# EAGLE board CT_schematic (EAGLE 7.6.0)

Size 100 x 80 mm. Coordinates in mm from the lower left corner, seen from the top.
Outline: 0,0 100,0 100,80 0,80 0,0
Copper layers (1*16): Top 0.035mm / dielectric 1.5mm / Bottom 0.035mm
Design rules "default": minimum track width 10mil, minimum drill 24mil, track to track 8mil, track to pad 8mil, pad to pad 8mil, via to via 8mil, smd to smd 8mil, copper to edge 40mil, drill to drill 8mil, minimum pad ring 10mil, minimum via ring 8mil, stop-mask expansion 4mil, vias tented up to drill 0mil, thermal gap 10mil

## Footprints (pad centres in the part's own frame; a part is rotated, then mirrored left to right if it is on the bottom)
C0603 = smd 0.8 x 0.8: 1 -0.762,0; 2 0.762,0
C0402 = smd 0.5 x 0.5: 1 -0.508,0; 2 0.508,0
C1206 = smd 1.3 x 1.6: 1 -1.524,0; 2 1.524,0
C0805 = smd 1.2 x 1.3: 1 -1.016,0; 2 1.016,0
2220 = smd 1.85 x 5.5: 1 -2.55,0; 2 2.55,0
C1210 = smd 1.2 x 2.5: 1 -1.524,0; 2 1.524,0
R0603 = smd 0.8 x 0.8: 1 -0.762,0; 2 0.762,0
EXV-9H = smd 3.505 x 1.676: 1 -2.857,0; 2 2.857,0
L0603 = smd 0.8 x 0.8: 1 -0.762,0; 2 0.762,0
DR1040 = smd 1.6 x 3.2: 1 -4.458,0; 2 4.458,0
PJ-037B_PACKAGE = drill 3.7 square: 1 12,0 | drill 3.2 square: 2 6,0
TFBGA100 = smd 0.4 x 0.4: A1 -3.6,3.6; A2 -2.8,3.6; A3 -2,3.6; A4 -1.2,3.6; A5 -0.4,3.6; A6 0.4,3.6; A7 1.2,3.6; A8 2,3.6; A9 2.8,3.6; A10 3.6,3.6; B1 -3.6,2.8; B2 -2.8,2.8; B3 -2,2.8; B4 -1.2,2.8; B5 -0.4,2.8; B6 0.4,2.8; B7 1.2,2.8; B8 2,2.8; B9 2.8,2.8; B10 3.6,2.8; C1 -3.6,2; C2 -2.8,2; C3 -2,2; C4 -1.2,2; C5 -0.4,2; C6 0.4,2; C7 1.2,2; C8 2,2; C9 2.8,2; C10 3.6,2; D1 -3.6,1.2; D2 -2.8,1.2; D3 -2,1.2; D4 -1.2,1.2; D5 -0.4,1.2; D6 0.4,1.2; D7 1.2,1.2; D8 2,1.2; D9 2.8,1.2; D10 3.6,1.2; E1 -3.6,0.4; E2 -2.8,0.4; E3 -2,0.4; E4 -1.2,0.4; E5 -0.4,0.4; E6 0.4,0.4; E7 1.2,0.4; E8 2,0.4; E9 2.8,0.4; E10 3.6,0.4; F1 -3.6,-0.4; F2 -2.8,-0.4; F3 -2,-0.4; F4 -1.2,-0.4; F5 -0.4,-0.4; F6 0.4,-0.4; F7 1.2,-0.4; F8 2,-0.4; F9 2.8,-0.4; F10 3.6,-0.4; G1 -3.6,-1.2; G2 -2.8,-1.2; G3 -2,-1.2; G4 -1.2,-1.2; G5 -0.4,-1.2; G6 0.4,-1.2; G7 1.2,-1.2; G8 2,-1.2; G9 2.8,-1.2; G10 3.6,-1.2; H1 -3.6,-2; H2 -2.8,-2; H3 -2,-2; H4 -1.2,-2; H5 -0.4,-2; H6 0.4,-2; H7 1.2,-2; H8 2,-2; H9 2.8,-2; H10 3.6,-2; J1 -3.6,-2.8; J2 -2.8,-2.8; J3 -2,-2.8; J4 -1.2,-2.8; J5 -0.4,-2.8; J6 0.4,-2.8; J7 1.2,-2.8; J8 2,-2.8; J9 2.8,-2.8; J10 3.6,-2.8; K1 -3.6,-3.6; K2 -2.8,-3.6; K3 -2,-3.6; K4 -1.2,-3.6; K5 -0.4,-3.6; K6 0.4,-3.6; K7 1.2,-3.6; K8 2,-3.6; K9 2.8,-3.6; K10 3.6,-3.6
SOIC-8 = smd 1.6 x 0.6: 1 -2.7,1.905 | smd 1.55 x 0.6: 2 -2.7,0.635; 3 -2.7,-0.635; 4 -2.7,-1.905; 5 2.7,-1.905; 6 2.7,-0.635; 7 2.7,0.635; 8 2.7,1.905
SAMTEC_FTSH-105-01-L-DV-K = smd 0.762 x 2.794: 1 -2.54,-2.032; 2 -2.54,2.032; 3 -1.27,-2.032; 4 -1.27,2.032; 5 0,-2.032; 6 0,2.032; 7 1.27,-2.032; 8 1.27,2.032; 9 2.54,-2.032; 10 2.54,2.032
TDFN-8/6MM = smd 0.3 x 0.75: 1 0,0; 2 0.5,0; 3 1,0; 4 1.5,0; 5 1.5,3; 6 1,3; 7 0.5,3; 8 0,3
QFN-24 = smd 0.7 x 0.305: 1 -1.815,1.25; 2 -1.815,0.75; 3 -1.815,0.25; 4 -1.815,-0.25; 5 -1.815,-0.73; 6 -1.815,-1.25; 13 1.815,-1.25; 14 1.815,-0.75; 15 1.815,-0.25; 16 1.815,0.25; 17 1.815,0.75; 18 1.815,1.25 | smd 0.305 x 0.7: 7 -1.25,-1.815; 8 -0.75,-1.815; 9 -0.25,-1.815; 10 0.25,-1.815; 11 0.75,-1.815; 12 1.25,-1.815; 19 1.25,1.815; 20 0.75,1.815; 21 0.25,1.815; 22 -0.25,1.815; 23 -0.75,1.815; 24 -1.25,1.815 | smd 2.591 x 2.591: 25 0,0
MICRO_USB_AB = smd 0.4 x 1.35: 1 1.3,0.26; 2 0.65,0.26; 3 0,0.26; 4 -0.65,0.26; 5 -1.3,0.26 | drill 0.6 pad 0.95 long: 6 4.175,-2.54; 7 -4.175,-2.54 | drill 0.7 pad 1.1 long: 8 -2.225,0.46; 9 2.225,0.46
SOT143B = smd 1 x 0.7: 1 -0.75,-1 | smd 0.6 x 0.7: 2 0.95,-1; 3 0.95,1; 4 -0.95,1
SOT-23-6 = smd 1.1 x 0.6: 1 -1.4,0.95; 2 -1.4,0; 3 -1.4,-0.95; 4 1.4,-0.95; 5 1.4,0; 6 1.4,0.95
ASEK = smd 1.4 x 1: 1 -1.1,-0.8; 2 1.1,-0.8; 3 1.1,0.8; 4 -1.1,0.8
ASFL1 = smd 1.7 x 1.5: 1 -1.27,-1.1; 2 1.27,-1.1; 3 1.27,1.1; 4 -1.27,1.1
WSON-8 = smd 0.3 x 0.6: 1 -0.75,0; 2 0.05,0; 3 0.85,0; 4 1.65,0; 5 1.65,3.8; 6 0.85,3.8; 7 0.05,3.8; 8 -0.75,3.8 | smd 3 x 2.6: PAD 0.45,1.9
QFN-16_EP = smd 0.805 x 0.3: 1 -1.452,0.75; 2 -1.452,0.25; 3 -1.452,-0.25; 4 -1.452,-0.75; 9 1.452,-0.75; 10 1.452,-0.25; 11 1.452,0.25; 12 1.452,0.75 | smd 0.3 x 0.805: 5 -0.75,-1.452; 6 -0.25,-1.452; 7 0.25,-1.452; 8 0.75,-1.452; 13 0.75,1.452; 14 0.25,1.452; 15 -0.25,1.452; 16 -0.75,1.452 | smd 1.55 x 1.55: 17 0,0
QFN-38_UHF = smd 0.75 x 0.3: 1 -2.4,2.75; 2 -2.4,2.25; 3 -2.4,1.75; 4 -2.4,1.25; 6 -2.4,0.25; 7 -2.4,-0.25; 8 -2.4,-0.75; 9 -2.4,-1.25; 10 -2.4,-1.75; 11 -2.4,-2.25; 12 -2.4,-2.75; 20 2.4,-2.75; 21 2.4,-2.25; 22 2.4,-1.75; 23 2.4,-1.25; 24 2.4,-0.75; 25 2.4,-0.25; 26 2.4,0.25; 27 2.4,0.75; 28 2.4,1.25; 29 2.4,1.75; 30 2.4,2.25; 31 2.4,2.75 | smd 0.758 x 0.3: 5 -2.4,0.75 | smd 0.3 x 0.75: 13 -1.5,-3.4; 14 -1,-3.4; 15 -0.5,-3.4; 16 0,-3.4; 17 0.5,-3.4; 18 1,-3.4; 19 1.5,-3.4; 32 1.5,3.4; 33 1,3.4; 34 0.5,3.4; 35 0,3.4; 36 -0.5,3.4; 37 -1,3.4; 38 -1.5,3.4 | smd 3.2 x 5.2: 39 0,0
IRF8306MTRPBF = smd 0.9 x 1.85: 1 0,0; 2 0,-2.35; 6 6.4,0; 7 6.4,-2.35 | smd 0.75 x 0.75: 3 1.75,-1.175 | smd 1.45 x 0.87: 4 3.5,-0.565; 5 3.5,-1.785
SW_4-1437565-2 = smd 1.4 x 2.1: 1 -2.23,4.55; 2 -2.23,-4.55; 3 2.23,4.55; 4 2.23,-4.55
LGM67K-G1J2-24-Z = smd 0.8 x 1.4: A -2,0; C 0,0
NC7SZ125M5X = smd 1.3 x 0.7: 1 -1.3,0.95; 2 -1.3,0; 3 -1.3,-0.95; 4 1.3,-0.95; 5 1.3,0.95

## Placement (x,y rotation side)
C1  1e-06  [C0603]  -81.28,76.2 0 top  (outside the outline)
C2  1e-07  [C0603]  -85.09,76.2 0 top  (outside the outline)
C3  1e-07  [C0603]  -15.24,81.28 0 top  (outside the outline)
C4  1e-07  [C0603]  -19.05,81.28 0 top  (outside the outline)
C5  1e-07  [C0603]  -22.86,81.28 0 top  (outside the outline)
C6  1e-07  [C0603]  -26.67,81.28 0 top  (outside the outline)
C7  4.7e-06  [C0603]  -69.85,76.2 0 top  (outside the outline)
C8  1e-08  [C0603]  -30.48,81.28 0 top  (outside the outline)
C9  1e-06  [C0603]  -34.29,81.28 0 top  (outside the outline)
C10  1e-07  [C0603]  -38.1,81.28 0 top  (outside the outline)
C11  1e-07  [C0603]  -41.91,81.28 0 top  (outside the outline)
C12  1e-07  [C0603]  -45.72,81.28 0 top  (outside the outline)
C13  1e-08  [C0402]  -48.26,86.36 0 top  (outside the outline)
C14  1e-08  [C0402]  -52.07,86.36 0 top  (outside the outline)
C15  1e-07  [C0402]  -55.88,86.36 0 top  (outside the outline)
C16  1e-08  [C0402]  -59.69,86.36 0 top  (outside the outline)
C17  1e-08  [C0402]  -63.5,86.36 0 top  (outside the outline)
C18  2.2e-06  [C0603]  -73.66,76.2 0 top  (outside the outline)
C19  1e-08  [C0402]  -67.31,86.36 0 top  (outside the outline)
C20  1e-08  [C0402]  -71.12,86.36 0 top  (outside the outline)
C21  1e-06  [C0603]  -49.53,81.28 0 top  (outside the outline)
C22  1e-08  [C0402]  -74.93,86.36 0 top  (outside the outline)
C23  1e-08  [C0402]  -78.74,86.36 0 top  (outside the outline)
C24  1e-08  [C0402]  -82.55,86.36 0 top  (outside the outline)
C25  1e-08  [C0402]  -86.36,86.36 0 top  (outside the outline)
C26  1e-05  [C1206]  -43.18,59.69 0 top  (outside the outline)
C27  1e-05  [C0805]  -78.74,59.69 0 top  (outside the outline)
C28  1e-05  [C0805]  -83.82,59.69 0 top  (outside the outline)
C29  1e-06  [C0603]  -53.34,81.28 0 top  (outside the outline)
C30  1e-07  [C0402]  -15.24,91.44 0 top  (outside the outline)
C31  6.8e-05  [2220]  -62.23,33.02 0 top  (outside the outline)
C32  1e-06  [C0603]  -57.15,81.28 0 top  (outside the outline)
C33  1e-05  [C1210]  -36.83,59.69 0 top  (outside the outline)
C34  1e-05  [C0805]  -15.24,66.04 0 top  (outside the outline)
C35  1e-06  [C0603]  -60.96,81.28 0 top  (outside the outline)
C36  1e-07  [C0402]  -19.05,91.44 0 top  (outside the outline)
C37  6.8e-05  [2220]  -69.85,33.02 0 top  (outside the outline)
C38  1e-08  [C0402]  -22.86,91.44 0 top  (outside the outline)
C39  1e-05  [C1206]  -49.53,59.69 0 top  (outside the outline)
C40  1e-05  [C0805]  -20.32,66.04 0 top  (outside the outline)
C41  1e-07  [C0402]  -26.67,91.44 0 top  (outside the outline)
C42  2.2e-06  [C0603]  -77.47,76.2 0 top  (outside the outline)
C43  2.45e-08  [R0603]  -15.24,71.12 0 top  (outside the outline)
C44  2.8258362168397e-09  [R0603]  -30.48,66.04 0 top  (outside the outline)
C45  7.105e-09  [R0603]  -48.26,66.04 0 top  (outside the outline)
C46  0.0001  [EXV-9H]  -64.77,50.8 0 top  (outside the outline)
C47  0.0001  [EXV-9H]  -76.2,50.8 0 top  (outside the outline)
C48  1e-08  [C0402]  -30.48,91.44 0 top  (outside the outline)
C49  1e-08  [C0402]  -34.29,91.44 0 top  (outside the outline)
C50  1e-08  [C0402]  -38.1,91.44 0 top  (outside the outline)
F1  240.0  [L0603]  -64.77,81.28 0 top  (outside the outline)
I1  2.5e-06  [DR1040]  -38.1,20.32 0 top  (outside the outline)
I2  2.5e-06  [DR1040]  -49.53,20.32 0 top  (outside the outline)
J1  PJ-037B  [PJ-037B_PACKAGE]  -74.93,7.62 0 top  (outside the outline)
R2  1000.0  [R0603]  -68.58,81.28 0 top  (outside the outline)
R7  4700.0  [R0603]  -72.39,81.28 0 top  (outside the outline)
R8  4700.0  [R0603]  -76.2,81.28 0 top  (outside the outline)
R9  2200.0  [R0603]  -80.01,81.28 0 top  (outside the outline)
R11  2200.0  [R0603]  -83.82,81.28 0 top  (outside the outline)
R13  10000.0  [R0603]  -20.32,71.12 0 top  (outside the outline)
R14  10000.0  [R0603]  -25.4,71.12 0 top  (outside the outline)
R15  10000.0  [R0603]  -30.48,71.12 0 top  (outside the outline)
R16  10000.0  [R0603]  -35.56,71.12 0 top  (outside the outline)
R17  10000.0  [R0603]  -40.64,71.12 0 top  (outside the outline)
R18  10000.0  [R0603]  -45.72,71.12 0 top  (outside the outline)
R19  10000.0  [R0603]  -50.8,71.12 0 top  (outside the outline)
R20  10000.0  [R0603]  -55.88,71.12 0 top  (outside the outline)
R21  10000.0  [R0603]  -60.96,71.12 0 top  (outside the outline)
R22  10000.0  [R0603]  -66.04,71.12 0 top  (outside the outline)
R23  10000.0  [R0603]  -71.12,71.12 0 top  (outside the outline)
R24  10000.0  [R0603]  -76.2,71.12 0 top  (outside the outline)
R25  5.0  [R0603]  -87.63,81.28 0 top  (outside the outline)
R26  47000.0  [R0603]  -81.28,71.12 0 top  (outside the outline)
R27  8060.0  [R0603]  -15.24,86.36 0 top  (outside the outline)
R28  100000.0  [R0603]  -53.34,66.04 0 top  (outside the outline)
R29  200.0  [R0603]  -19.05,86.36 0 top  (outside the outline)
R30  1000.0  [R0603]  -22.86,86.36 0 top  (outside the outline)
R31  20000.0  [R0603]  -86.36,71.12 0 top  (outside the outline)
R32  39000.0  [R0603]  -15.24,76.2 0 top  (outside the outline)
R33  300000.0  [R0603]  -58.42,66.04 0 top  (outside the outline)
R34  100000.0  [R0603]  -63.5,66.04 0 top  (outside the outline)
R35  153694.38  [R0603]  -43.18,66.04 0 top  (outside the outline)
R36  100000.0  [R0603]  -68.58,66.04 0 top  (outside the outline)
R37  20000.0  [R0603]  -20.32,76.2 0 top  (outside the outline)
R38  150000.0  [R0603]  -73.66,66.04 0 top  (outside the outline)
R39  300000.0  [R0603]  -78.74,66.04 0 top  (outside the outline)
R40  100000.0  [R0603]  -83.82,66.04 0 top  (outside the outline)
R41  200.0  [R0603]  -26.67,86.36 0 top  (outside the outline)
R42  1000.0  [R0603]  -30.48,86.36 0 top  (outside the outline)
R43  10000.0  [R0603]  -25.4,76.2 0 top  (outside the outline)
R44  75000.0  [R0603]  -30.48,76.2 0 top  (outside the outline)
R45  10000.0  [R0603]  -35.56,76.2 0 top  (outside the outline)
R46  10000.0  [R0603]  -40.64,76.2 0 top  (outside the outline)
R47  95300.0  [R0603]  -45.72,76.2 0 top  (outside the outline)
R48  95300.0  [R0603]  -50.8,76.2 0 top  (outside the outline)
R49  10000.0  [R0603]  -55.88,76.2 0 top  (outside the outline)
R50  10000.0  [R0603]  -60.96,76.2 0 top  (outside the outline)
R51  10000.0  [R0603]  -66.04,76.2 0 top  (outside the outline)
R52  40981.818181818  [R0603]  -38.1,66.04 0 top  (outside the outline)
U1  STM32F746VGH6  [TFBGA100]  -54.61,7.62 0 top  (outside the outline)
U2  AT25080B-SSHL-T  [SOIC-8]  -80.01,20.32 0 top  (outside the outline)
U3  AT25256B-SSHL-T  [SOIC-8]  -24.13,33.02 0 top  (outside the outline)
U4  FTSH-105-01-L-DV-K  [SAMTEC_FTSH-105-01-L-DV-K]  -35.56,7.62 0 top  (outside the outline)
U5  24AA04-I/MC  [TDFN-8/6MM]  -64.77,19.05 0 top  (outside the outline)
U6  USB3317C-CP-TR  [QFN-24]  -29.21,59.69 0 top  (outside the outline)
U7  47590-0001  [MICRO_USB_AB]  -83.82,7.62 0 top  (outside the outline)
U8  prtr5v0u2ax  [SOT143B]  -50.8,91.44 0 top  (outside the outline)
U9  MAX4995AAUT+T  [SOT-23-6]  -54.61,58.42 0 top  (outside the outline)
U10  ASEK-32.768KHz-ECST  [ASEK]  -55.88,50.8 0 top  (outside the outline)
U11  ASFL1-25MHZ-NCS  [ASFL1]  -85.09,41.91 0 top  (outside the outline)
U12  ASFL1-26MHZ-NCS  [ASFL1]  -26.67,52.07 0 top  (outside the outline)
U13  LP3878SDX-ADJ/NOPB  [WSON-8]  -30.48,40.64 0 top  (outside the outline)
U14  LTC3601EUD#PBF  [QFN-16_EP]  -35.56,86.36 0 top  (outside the outline)
U15  LP2951ACSDX/NOPB  [WSON-8]  -68.58,40.64 0 top  (outside the outline)
U16  LTC3601EUD#PBF  [QFN-16_EP]  -41.91,86.36 0 top  (outside the outline)
U17  LP3878SDX-ADJ/NOPB  [WSON-8]  -50.8,40.64 0 top  (outside the outline)
U18  LTC2928CUHF#PBF  [QFN-38_UHF]  -34.29,50.8 0 top  (outside the outline)
U19  IRF8306MTRPbF  [IRF8306MTRPBF]  -41.91,33.02 0 top  (outside the outline)
U20  IRF8306MTRPbF  [IRF8306MTRPBF]  -57.15,33.02 0 top  (outside the outline)
U21  4-1437565-2  [SW_4-1437565-2]  -27.94,21.59 0 top  (outside the outline)
U22  Q65110A2395  [LGM67K-G1J2-24-Z]  -17.78,59.69 0 top  (outside the outline)
U23  nc7sz125m5x  [NC7SZ125M5X]  -59.69,58.42 0 top  (outside the outline)
U24  nc7sz125m5x  [NC7SZ125M5X]  -66.04,58.42 0 top  (outside the outline)
U25  nc7sz125m5x  [NC7SZ125M5X]  -72.39,58.42 0 top  (outside the outline)

## Library data of the parts
C1-C50 F1 I1 I2 J1 R2 R7-R9 R11 R13-R52 U1-U25 = circuit_tree

## Nets
CLK_U1_A1: U1.A1 U10.3
CLK_U1_C1: U1.C1 U11.3
CLK_U6_23: U6.23 U12.3
GND: C1.2 C2.2 C3.2 C4.2 C5.2 C6.2 C7.2 C8.2 C9.2 C10.2 C11.2 C12.2 C13.2 C14.2 C15.2 C16.2 C17.2 C18.2 C19.2 C20.2 C21.2 C22.2 C23.2 C24.2 C25.2 C26.2 C27.2 C28.2 C29.2 C31.1 C31.2 C32.2 C33.2 C34.2 C35.2 C37.1 C37.2 C38.2 C39.2 C40.2 C41.2 C42.2 C43.2 C44.2 C45.2 C46.2 C47.2 C48.2 C49.2 C50.2 J1.2 R2.2 R13.2 R25.2 R26.2 R27.2 R30.2 R31.2 R33.2 R36.2 R37.2 R39.2 R42.2 R44.2 R47.2 R48.2 R49.2 R50.2 R51.2 U1.C2 U1.E4 U1.E5 U1.G1 U1.J1 U2.4 U3.4 U4.3 U4.5 U5.4 U6.25 U7.5 U7.6 U7.7 U7.8 U7.9 U8.1 U9.2 U10.2 U11.2 U12.2 U13.3 U13.PAD U14.1 U14.9 U14.17 U15.3 U15.4 U15.PAD U16.1 U16.9 U16.17 U17.3 U17.PAD U18.8 U18.9 U18.10 U18.12 U18.13 U18.24 U18.25 U18.30 U18.32 U18.39 U22.C U23.2 U23.3 U24.1 U24.3 U25.1 U25.3
NET_U1_A4: R11.1 U1.A4 U5.5
NET_U1_B4: R9.1 U1.B4 U5.6
NET_U1_D5: R13.1 U1.D5
NET_U1_E1: R7.1 U1.E1 U24.4
NET_U1_E6: R15.1 U1.E6
NET_U1_E7: C12.1 U1.E7
NET_U1_F7: R14.1 U1.F7
NET_U1_H1: C8.1 C9.1 F1.1 U1.H1
NET_U1_K9: U22.A
NET_U1_K10: U21.3 U21.4
NET_U2_3: R16.1 U2.3
NET_U2_7: R18.1 U2.7
NET_U3_3: R19.1 U3.3
NET_U3_7: R21.1 U3.7
NET_U4_9: R25.1 U4.9
NET_U6_4: C18.1 U6.4
NET_U6_22: R8.1 U6.22 U25.4
NET_U6_24: R27.1 U6.24
NET_U7_1: C21.1 U6.2 U7.1 U8.4 U9.1
NET_U7_2: U6.5 U7.2 U8.3
NET_U7_3: U6.6 U7.3 U8.2
NET_U7_4: U6.1 U7.4
NET_U9_1: U9.1
NET_U9_3: R26.1 U9.3
NET_U9_4: U6.7 U9.4
NET_U13_1: C25.1 U13.1
NET_U13_6: R29.2 R30.1 U13.6
NET_U13_8: R28.1 U13.8
NET_U14_3: C30.2 I1.1 U14.3 U14.4
NET_U14_6: C30.1 U14.6
NET_U14_7: C29.1 U14.7 U14.12
NET_U14_10: R33.1 U14.10
NET_U14_11: R31.1 R32.1 U14.11
NET_U14_14: U14.14
NET_U14_ATNET_3: I1.2 R32.2
NET_U15_5: R34.1 U15.5
NET_U15_7: R35.2 R36.1 U15.7
NET_U16_3: C36.2 I2.1 U16.3 U16.4
NET_U16_6: C36.1 U16.6
NET_U16_7: C35.1 U16.7 U16.12
NET_U16_10: R39.1 U16.10
NET_U16_11: R37.1 R38.1 U16.11
NET_U16_14: U16.14
NET_U16_ATNET_3: I2.2 R38.2
NET_U17_1: C38.1 U17.1
NET_U17_6: R41.2 R42.1 U17.6
NET_U17_8: R40.1 U17.8
NET_U18_3: R50.1 U18.3
NET_U18_6: R47.1 U18.6
NET_U18_7: R48.1 U18.7
NET_U18_16: R49.1 R52.1 U18.16
NET_U18_18: R46.1 U18.18
NET_U18_19: R45.1 U18.19 U18.20
NET_U18_21: R43.1 R44.1 U18.21 U23.4 U24.2 U25.2
NET_U18_26: C44.1 U18.26
NET_U18_27: C43.1 U18.27
NET_U18_28: C45.1 U18.28
NET_U18_38: R51.1 U18.38
NET_U19_3: U18.2 U19.3
NET_U20_3: U18.37 U20.3
NET_U21_1: R2.1 U21.1 U21.2
PROC_SPI2_MISO: U1.H10 U2.2
PROC_SPI2_MOSI: U1.F2 U2.5
PROC_SPI2_NSS: R17.1 U1.A6 U2.1
PROC_SPI2_SCK: U1.C7 U2.6
PROC_SPI3_MISO: U1.B8 U3.2
PROC_SPI3_MOSI: U1.C6 U3.5
PROC_SPI3_NSS: R20.1 U1.A8 U3.1
PROC_SPI3_SCK: U1.B9 U3.6
PROC_SYS_JTCK_SWCLK: R23.1 U1.A9 U4.4
PROC_SYS_JTDO_SWO: U1.A7 U4.6
PROC_SYS_JTMS_SWDIO: R24.1 U1.A10 U4.2
PROC_USB_OTG_HS_ULPI_CK: U1.H3 U6.12
PROC_USB_OTG_HS_ULPI_D0: U1.K2 U6.16
PROC_USB_OTG_HS_ULPI_D1: U1.J4 U6.15
PROC_USB_OTG_HS_ULPI_D2: U1.K4 U6.14
PROC_USB_OTG_HS_ULPI_D3: U1.J7 U6.13
PROC_USB_OTG_HS_ULPI_D4: U1.K7 U6.11
PROC_USB_OTG_HS_ULPI_D5: U1.K8 U6.10
PROC_USB_OTG_HS_ULPI_D6: U1.J8 U6.9
PROC_USB_OTG_HS_ULPI_D7: U1.C5 U6.8
PROC_USB_OTG_HS_ULPI_DIR: U1.E2 U6.19
PROC_USB_OTG_HS_ULPI_NXT: U1.F3 U6.18
PROC_USB_OTG_HS_ULPI_STP: U1.F1 U6.20
RST_OUT_U4_JTAG_RST_B: R22.1 U4.10 U23.1
VCC_5V7: C41.1 C42.1 C46.1 C47.1 J1.1 R43.2 R45.2 R46.2 R52.2 U18.11 U18.22 U19.1 U19.2 U19.6 U19.7 U20.1 U20.2 U20.6 U20.7
VCC_S1_5V7: C26.1 C28.1 C32.1 C34.1 R28.2 U13.4 U14.15 U14.16 U15.8 U16.15 U16.16 U19.4 U19.5
VCC_S2_5V7: C39.1 R40.2 U17.4 U20.4 U20.5
VCC_TIER1_1V2: C11.1 C27.1 R29.1 U1.F8 U13.5
VCC_TIER1_1V8: C1.1 C2.1 C3.1 C4.1 C5.1 C6.1 C7.1 C13.1 C14.1 C15.1 C16.1 C19.1 C20.1 C31.2 C48.1 C49.1 C50.1 F1.2 I1.2 R7.2 R8.2 R9.2 R11.2 R14.2 R15.2 R16.2 R17.2 R18.2 R19.2 R20.2 R21.2 R22.2 R23.2 R24.2 R32.2 U1.B2 U1.D2 U1.F4 U1.F5 U1.K1 U2.8 U3.8 U4.1 U5.7 U5.8 U6.17 U6.21 U14.8 U23.5 U24.5 U25.5
VCC_TIER1_3V3: C10.1 C17.1 C22.1 C23.1 C24.1 C33.1 R34.2 R35.1 U1.F6 U6.3 U10.4 U11.4 U12.4 U15.1
VCC_TIER1_5V0: C37.2 I2.2 R38.2 U9.5 U16.8
VCC_TIER2_1V2: C40.1 R41.1 U17.5

## Tracks (layer width: path | path; a pad name or v marks a point on that pad's centre or on a via)
CLK_U1_A1  (1 unrouted)
CLK_U1_C1  (1 unrouted)
CLK_U6_23  (1 unrouted)
GND  (119 unrouted)
NET_U1_A4  (2 unrouted)
NET_U1_B4  (2 unrouted)
NET_U1_D5  (1 unrouted)
NET_U1_E1  (2 unrouted)
NET_U1_E6  (1 unrouted)
NET_U1_E7  (1 unrouted)
NET_U1_F7  (1 unrouted)
NET_U1_H1  (3 unrouted)
NET_U1_K10  (1 unrouted)
NET_U2_3  (1 unrouted)
NET_U2_7  (1 unrouted)
NET_U3_3  (1 unrouted)
NET_U3_7  (1 unrouted)
NET_U4_9  (1 unrouted)
NET_U6_4  (1 unrouted)
NET_U6_22  (2 unrouted)
NET_U6_24  (1 unrouted)
NET_U7_1  (4 unrouted)
NET_U7_2  (2 unrouted)
NET_U7_3  (2 unrouted)
NET_U7_4  (1 unrouted)
NET_U9_3  (1 unrouted)
NET_U9_4  (1 unrouted)
NET_U13_1  (1 unrouted)
NET_U13_6  (2 unrouted)
NET_U13_8  (1 unrouted)
NET_U14_3  (3 unrouted)
NET_U14_6  (1 unrouted)
NET_U14_7  (2 unrouted)
NET_U14_10  (1 unrouted)
NET_U14_11  (2 unrouted)
NET_U14_ATNET_3  (1 unrouted)
NET_U15_5  (1 unrouted)
NET_U15_7  (2 unrouted)
NET_U16_3  (3 unrouted)
NET_U16_6  (1 unrouted)
NET_U16_7  (2 unrouted)
NET_U16_10  (1 unrouted)
NET_U16_11  (2 unrouted)
NET_U16_ATNET_3  (1 unrouted)
NET_U17_1  (1 unrouted)
NET_U17_6  (2 unrouted)
NET_U17_8  (1 unrouted)
NET_U18_3  (1 unrouted)
NET_U18_6  (1 unrouted)
NET_U18_7  (1 unrouted)
NET_U18_16  (2 unrouted)
NET_U18_18  (1 unrouted)
NET_U18_19  (2 unrouted)
NET_U18_21  (5 unrouted)
NET_U18_26  (1 unrouted)
NET_U18_27  (1 unrouted)
NET_U18_28  (1 unrouted)
NET_U18_38  (1 unrouted)
NET_U19_3  (1 unrouted)
NET_U20_3  (1 unrouted)
NET_U21_1  (2 unrouted)
PROC_SPI2_MISO  (1 unrouted)
PROC_SPI2_MOSI  (1 unrouted)
PROC_SPI2_NSS  (2 unrouted)
PROC_SPI2_SCK  (1 unrouted)
PROC_SPI3_MISO  (1 unrouted)
PROC_SPI3_MOSI  (1 unrouted)
PROC_SPI3_NSS  (2 unrouted)
PROC_SPI3_SCK  (1 unrouted)
PROC_SYS_JTCK_SWCLK  (2 unrouted)
PROC_SYS_JTDO_SWO  (1 unrouted)
PROC_SYS_JTMS_SWDIO  (2 unrouted)
PROC_USB_OTG_HS_ULPI_CK  (1 unrouted)
PROC_USB_OTG_HS_ULPI_D0  (1 unrouted)
PROC_USB_OTG_HS_ULPI_D1  (1 unrouted)
PROC_USB_OTG_HS_ULPI_D2  (1 unrouted)
PROC_USB_OTG_HS_ULPI_D3  (1 unrouted)
PROC_USB_OTG_HS_ULPI_D4  (1 unrouted)
PROC_USB_OTG_HS_ULPI_D5  (1 unrouted)
PROC_USB_OTG_HS_ULPI_D6  (1 unrouted)
PROC_USB_OTG_HS_ULPI_D7  (1 unrouted)
PROC_USB_OTG_HS_ULPI_DIR  (1 unrouted)
PROC_USB_OTG_HS_ULPI_NXT  (1 unrouted)
PROC_USB_OTG_HS_ULPI_STP  (1 unrouted)
RST_OUT_U4_JTAG_RST_B  (2 unrouted)
VCC_5V7  (18 unrouted)
VCC_S1_5V7  (12 unrouted)
VCC_S2_5V7  (4 unrouted)
VCC_TIER1_1V2  (4 unrouted)
VCC_TIER1_1V8  (50 unrouted)
VCC_TIER1_3V3  (13 unrouted)
VCC_TIER1_5V0  (4 unrouted)
VCC_TIER2_1V2  (2 unrouted)